# EAGLE board Full Side Panel V3 (EAGLE 7.2.0)
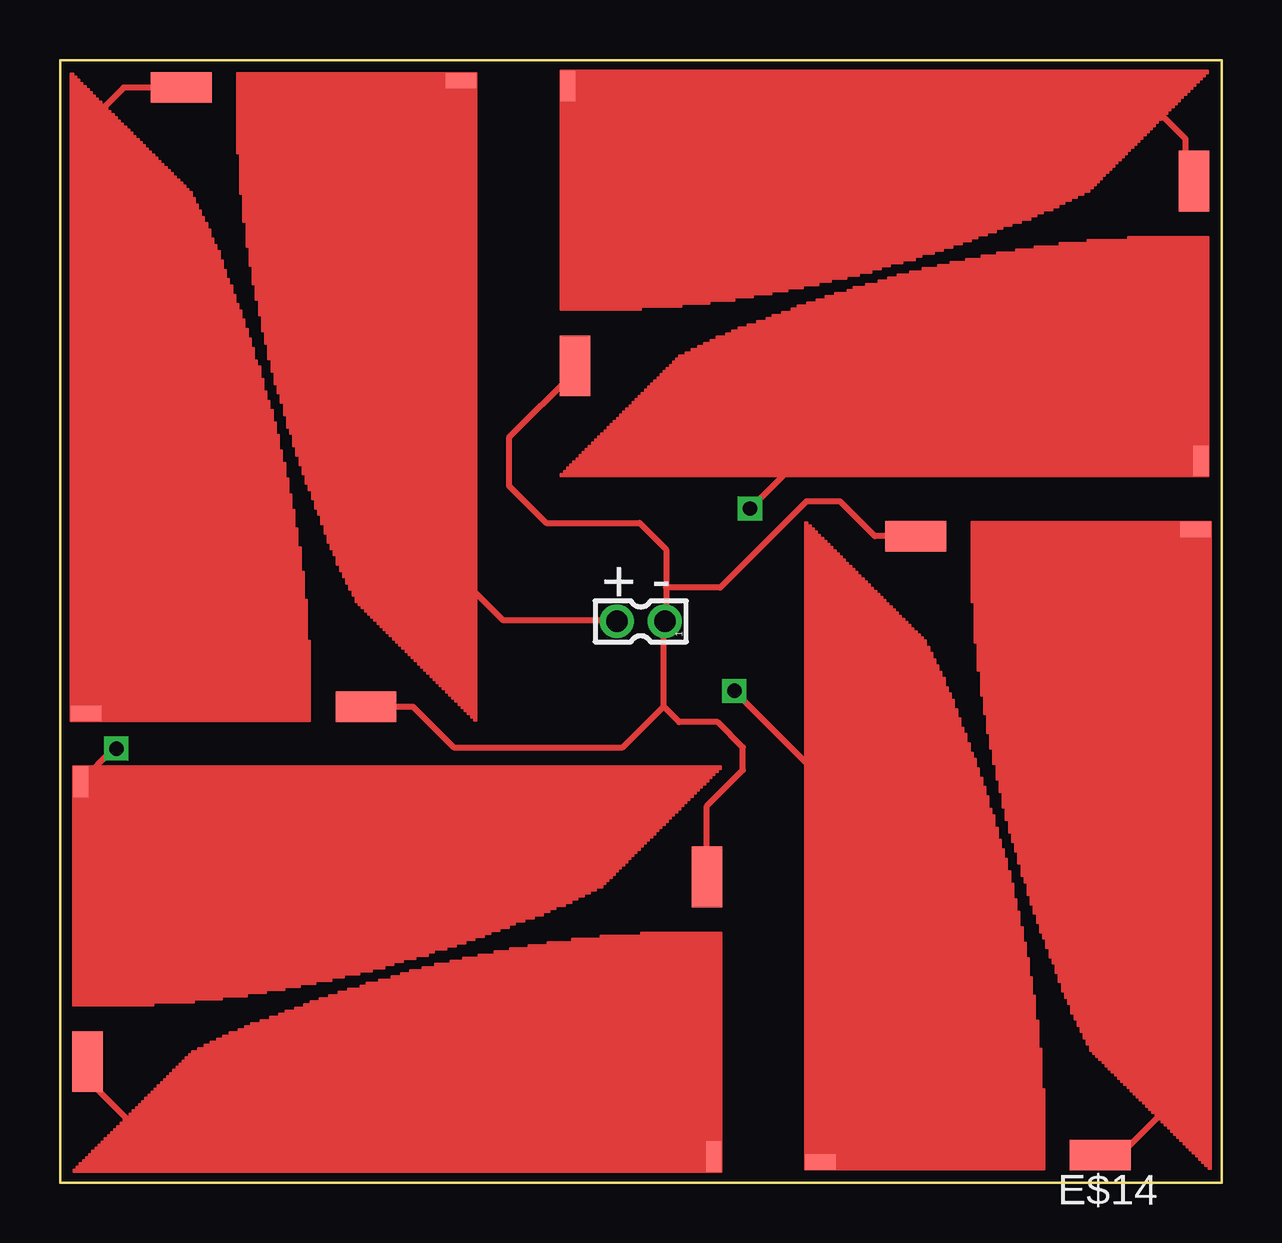
[diagram p0: board, top side]
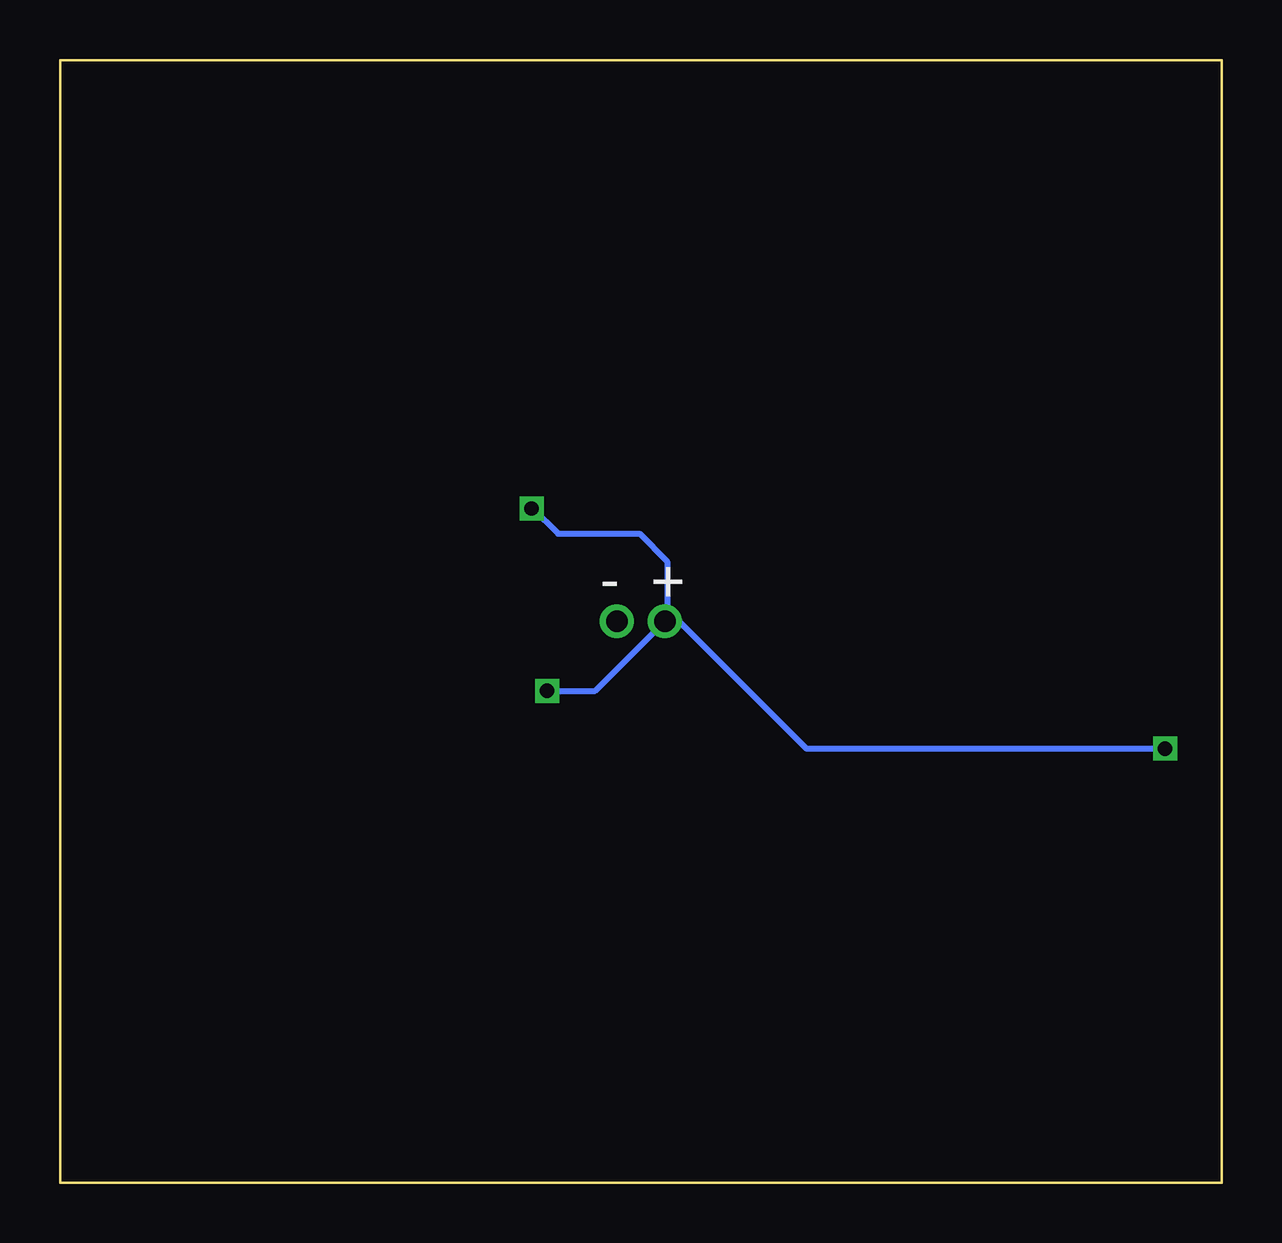
[diagram p1: board, bottom side, seen from below]

Size 48.4 x 46.8 mm. Coordinates in mm from the lower left corner, seen from the top.
Outline: 0,0 48.4,0 48.4,46.8 0,46.8 0,0
Copper layers (1*16): Top 0.035mm / dielectric 1.5mm / Bottom 0.035mm
Design rules "default": minimum track width 10mil, minimum drill 24mil, track to track 8mil, track to pad 8mil, pad to pad 8mil, via to via 8mil, smd to smd 8mil, copper to edge 40mil, drill to drill 8mil, minimum pad ring 10mil, minimum via ring 8mil, stop-mask expansion 4mil, vias tented up to drill 0mil, thermal gap 10mil

## Footprints (pad centres in the part's own frame; a part is rotated, then mirrored left to right if it is on the bottom)
TRISOLX = smd 1.27 x 0.635: P$1 0.584,0.26
SMD1,27-2,54 = smd 1.27 x 2.54: 1 0,0
332-02 = drill 0.9 pad 1.27: 1 0,-1; 2 0,1

## Placement (x,y rotation side)
E$1  [TRISOLX]  27.5,0.5 90 top
E$2  [TRISOLX]  0.6,17.3 270 top
E$3  [TRISOLX]  47.9,27.5 180 top
E$4  [TRISOLX]  31.1,0.6 0 top
E$5  [TRISOLX]  17.3,46.2 180 top
E$6  [TRISOLX]  0.5,19.3 0 top
E$7  [TRISOLX]  20.9,46.3 270 top
E$8  [TRISOLX]  47.8,29.5 90 top
E$9  [SMD1,27-2,54]  26.95,12.75 0 top
E$10  [SMD1,27-2,54]  5.05,45.65 90 top
E$11  [SMD1,27-2,54]  35.65,26.95 90 top
E$12  [SMD1,27-2,54]  12.75,19.85 90 top
E$13  [SMD1,27-2,54]  1.15,5.05 0 top
E$14  [SMD1,27-2,54]  43.35,1.15 90 top
E$15  [SMD1,27-2,54]  47.25,41.75 180 top
E$16  [SMD1,27-2,54]  21.45,34.05 180 top
E$17  [332-02]  24.2,23.4 90 top

## Library data of the parts
E$1-E$8 = trisolx
E$9-E$16 = wirepad
E$17 = con-garry

## Nets
S$1: E$2.P$1 E$4.P$1 E$5.P$1 E$8.P$1 E$17.2
S$2: E$9.1 E$11.1 E$12.1 E$16.1 E$17.1
S$3: E$6.P$1 E$10.1
S$4: E$7.P$1 E$15.1
S$5: E$1.P$1 E$13.1
S$6: E$3.P$1 E$14.1

## Tracks (layer width: path | path; a pad name or v marks a point on that pad's centre or on a via)
S$1  (via drill 0.6)
  Top 0.254: E$5.P$1 16.72,25.18 18.45,23.45 23.15,23.45 E$17.2 | E$8.P$1 30.73,30.08 v28.75,28.1 | v2.35,18.1 2.24,18.1 E$2.P$1 | E$4.P$1 31.68,16.92 v28.1,20.5
  Bottom 0.254: v28.75,28.1 28.7,28.1 27.65,27.05 24.25,27.05 23.1,25.9 23.1,23.5 E$17.2 | E$17.2 22.6,23.4 17.3,18.1 v2.35,18.1 | v28.1,20.5 26.1,20.5 E$17.2
S$2
  Top 0.254: E$12.1 14.7,19.85 16.4,18.15 23.45,18.15 25.15,19.85 | 25.15,19.85 25.15,23.35 E$17.1 25.25,23.45 25.25,24.8 | E$16.1 21.45,33.8 18.7,31.05 18.7,29.05 20.25,27.5 24.15,27.5 25.25,26.4 25.25,24.8 | E$11.1 33.95,26.95 32.5,28.4 31.1,28.4 27.5,24.8 25.25,24.8 | E$9.1 26.95,15.7 28.45,17.2 28.45,18.15 27.4,19.2 25.8,19.2 25.15,19.85
S$3
  Top 0.254: E$10.1 2.65,45.65 1.05,44.05 1.05,19.59 E$6.P$1
S$4
  Top 0.254: E$15.1 47.25,41.9 46.9,42.25 46.9,43.5 44.65,45.75 21.19,45.75 E$7.P$1
S$5
  Top 0.254: E$13.1 1.15,4.3 4.4,1.05 27.21,1.05 E$1.P$1
S$6
  Top 0.254: E$14.1 44.15,1.15 47.45,4.45 47.45,27.11 E$3.P$1

## Text on the board
tPlace: + | -
bPlace: + | -